# Altium PCB PCB1.PcbDoc
Units mm, origin at the board's own origin, x right, y up, seen from the top; angles counter-clockwise.
Board outline 30 x 11 mm, 2 copper layers (Top Layer, Bottom Layer), stack 1.571 mm thick; 13 components, 10 nets, 54 pads, 8 vias.
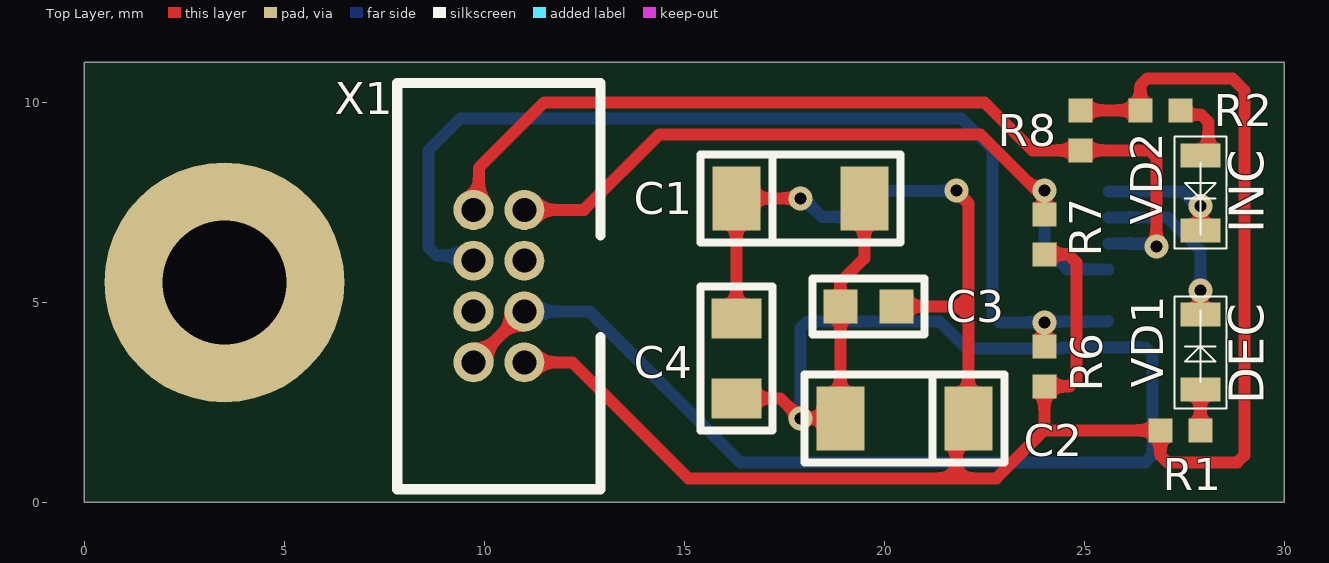
[diagram p0: Top Layer view]
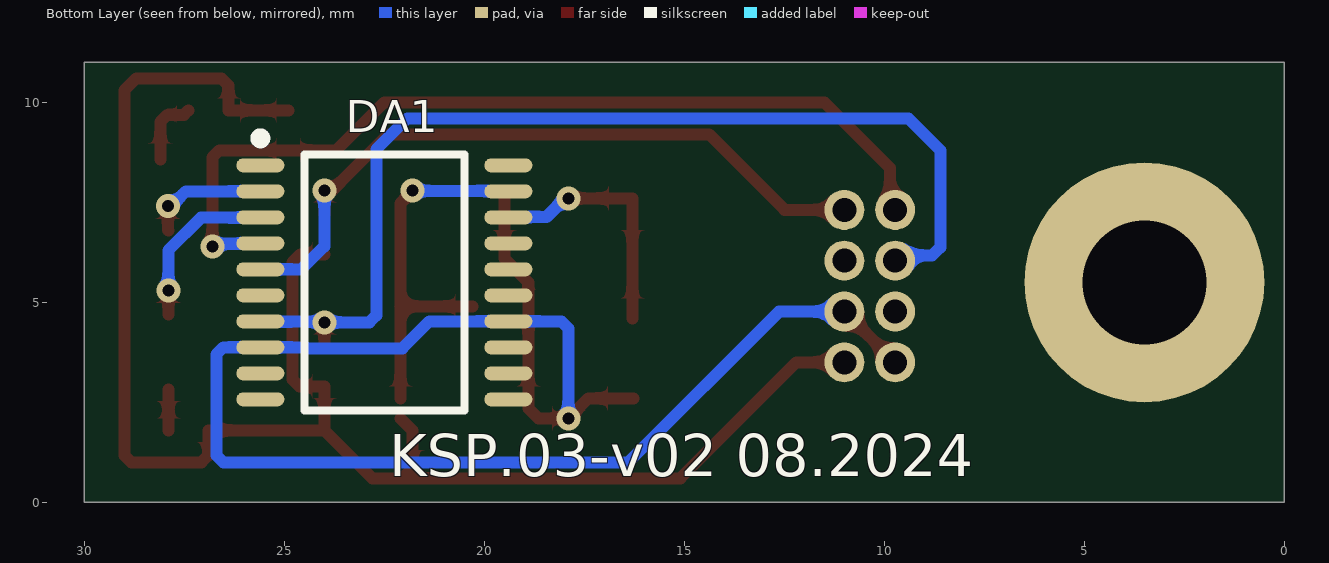
[diagram p1: Bottom Layer view, seen from below]
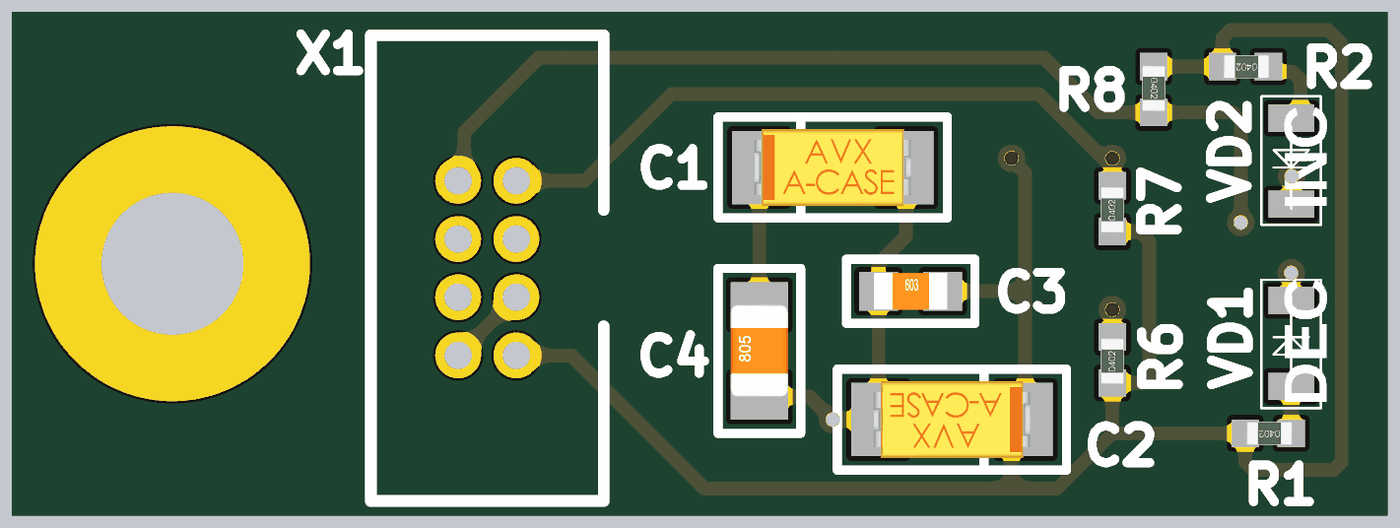
[diagram p2: 3D render of the assembled board from above, using the file's embedded part models]

## Layer stack, top to bottom
Top Solder: solder mask 0.0102, Solder Resist, Dk 3.5
Top Layer: signal copper 0.0356
Dielectric 1: dielectric 1.5, FR-4, Dk 4.8
Bottom Layer: signal copper 0.0356
Bottom Solder: solder mask 0.0102, Solder Resist, Dk 3.5

## Board outline
0,0 0,11 30,11 30,0

## Design rules (kind name [scope] priority, off if disabled: settings)
Clearance [All] p1: gap=0.2 ignorepadtopadclearanceinfootprint=FALSE except(0: Arc-Hole Track-Hole SMDPad-Hole THPad-Hole Via-Hole Fill-Hole Poly-Hole Region-Hole Text-Hole)
PolygonConnect [All] p1: connectstyle=Relief reliefconductorwidth=0.254 reliefentries=4 polygonreliefangle="90 Angle" airgapwidth=0.254
RoutingVias [All] p1: holewidth=0.711 width=1.27 viastyle="Through Hole" minholewidth=0.3 minwidth=0.6 maxholewidth=0.711 maxwidth=1.27
SolderMaskExpansion [All] p1: expansion=0.102 istentingtop=FALSE
Width [All] p1: maxlimit=3 minlimit=0.2 preferedwidth=0.5 minimp=50.000000 maximp=50.000000 favimp=50.000000
30 further rules are at their usual default settings.

## Components (designator, comment, footprint, x,y, rotation, side; value= is the part's Value field where it differs from the comment)
C1 "4.7u" TANTAL_A 17.9,7.6 r0 top
C2 "4.7u" TANTAL_A 20.5,2.1 r180 top
C3 "0.1u" CH0603C 19.6,4.9 r0 top
C4 "0.1u" CH0805C 16.3,3.6 r90 top
DA1 "AS5311" 20-TSSOP 22.5,5.5 r180 bottom
R1 "1k" CH0402R 27.4,1.8 r180 top
R2 "1k" CH0402R 26.9,9.8 r180 top
R6 "10k" CH0402R 24,3.4 r90 top
R7 "10k" CH0402R 24,6.7 r90 top
R8 "10k" CH0402R 24.9,9.3 r270 top
VD1 "LED" VD_0603 27.9,3.9 r90 top
VD2 "LED" VD_0603 27.9,7.6 r270 top
X1 "DC3-8P" "CON: DC3 2X4P" 11,3.5 r90 top

## Footprints (in the part's own frame and the unit in brackets; to place one, negate y for a bottom-side part, rotate by r counter-clockwise, add the part's x,y. Pads: shape width x height; smd on the part's side, far side on the other; paste and mask are expansions set on the pad)
20-TSSOP [mm]
  oval 1.2x0.35 smd: 1(-3.1,2.925) 2(-3.1,2.275) 3(-3.1,1.625) 4(-3.1,0.975) 5(-3.1,0.325) 6(-3.1,-0.325) 7(-3.1,-0.975) 8(-3.1,-1.625) 9(-3.1,-2.275) 10(-3.1,-2.925) 11(3.1,-2.925) 12(3.1,-2.275) 13(3.1,-1.625) 14(3.1,-0.975) 15(3.1,-0.325) 16(3.1,0.325) 17(3.1,0.975) 18(3.1,1.625) 19(3.1,2.275) 20(3.1,2.925)
  round 0.5 on Mech1: ""(-2.8,2.8)
  silkscreen extent -3.22,-3.2 2,3.72, body extent -3.3,-3.3 3.3,3.3, height 1.1
CH0402R [mm]
  rect 0.6x0.6 smd: 1(-0.5,0) 2(0.5,0)
  body extent -0.52,-0.25 0.47,0.25, height 0.34
CH0603C [mm] "Chip Capacitor, 2-Leads, Body 1,53x0,85mm, IPC Medium Density"
  rect 0.85x0.85 smd: 1(-0.7,0) 2(0.7,0)
  silkscreen extent -1.4,-0.7 1.4,0.7, body extent -0.8,-0.4 0.8,0.4, height 0.3
CH0805C [mm] "Chip Capacitor, 2-Leads, Body 2,00x1,20mm, IPC Medium Density"
  rect 1x1.25 smd: 1(-1,0) 2(1,0)
  silkscreen extent -1.8,-0.9 1.8,0.9, body extent -1,-0.62 1,0.63, height 0.78
"CON: DC3 2X4P" [mm]
  round 1 hole 0.6 mask+0.05: 1(0,0) 2(0,1.27) 3(1.27,0) 4(1.27,1.27) 5(2.54,0) 6(2.54,1.27) 7(3.81,0) 8(3.81,1.27)
  silkscreen extent -3.18,-1.91 6.98,3.18, body extent -3.1,-1.91 6.91,3.1, height 4.9
TANTAL_A [mm]
  rect 1.2x1.6 smd: 1(-1.6,0) 2(1.6,0)
  round 0.5 on Mech1: ""(-1.2,0.4)
  silkscreen extent -2.5,-1.1 2.5,1.1, body extent -1.7,-0.84 1.7,0.84, height 1.71
VD_0603 [mm]
  rect 0.6x1 smd: 1(-1.075,0) 2(0.8,0)
  silkscreen extent -1.55,-0.65 1.25,0.65

## Part data
C1 C2: library part TantalCap, Manufacturer=10u, Model=TAJA475M010RNJ
C3 C4: library part Capacitor
  C3: Model=06035C104JAT2A
  C4: Model=08055C104JAT2A
R1 R2 R6 R7 R8: library part Resistor
  R1 R2: Model=CR0402-JW-102GLF
  R6 R7 R8: Model=CR0402-JW-103GLF
X1: library part 8-Connector, Model=DC3-8P
DA1: Model=AS5311-ATST
VD1: Model=KPT-1608SGC
VD2: Model=KPT-1608YC

## Free pads (board coordinates)
  round 6 hole 3.1 mask+0.05: N(3.5,5.5)

## Via types
v1: diameter 0.6, hole 0.3, Top Layer to Bottom Layer, tented both sides, 8 vias

## Nets (pads, with @x,y where several pads share a name; then routed paths per layer and width w, separated by ;. In a path a pad name is that pad's centre, name@x,y a point inside that pad or via, vN(x,y) a via of type N, cw(c..) or ccw(c..) an arc to the next point about the centre after c; other vN are vias at no path point)
GND: C1.2 C2.2 C3.1 C4.1 DA1.8 DA1.14 X1.2 X1.3 | length 41.5
  Top Layer w0.3: X1.2 X1.3 ; C4.1@16.275,2.6 C4.1 17.4,2.6 v1(17.9,2.1) 18.65,2.1 18.9,2.35 18.9,4.2 18.9,5.5 19.5,6.1 C1.2
  Bottom Layer w0.3: X1.3 12.63,4.77 16.4,1 26.524,1 26.7,1.176 26.7,3.699 26.524,3.875 DA1.8 24.454,3.875 24.429,3.85 22.05,3.85 21.375,4.525 DA1.14 18.076,4.525 17.9,4.349 v1@17.9,2.126
NetC1_1: C1.1 C4.2 DA1.18 | length 6.3
  Top Layer w0.3: C4.2 C1.1 v1(17.9,7.6)
  Bottom Layer w0.3: v1(17.9,7.6) 17.981,7.6 18.447,7.135 19.39,7.135 DA1.18
NetC2_1: C2.1 C3.2 DA1.19 R1.2 R2.2 R6.1 R7.1 R8.1 X1.1 | length 51.3
  Top Layer w0.3: X1.1 12.2,3.5 15.1,0.6 21.8,0.6 ; C3.2 22.1,4.9 ; v1(21.8,7.8) 21.8,7.774 22.1,7.474 22.1,4.9 ; C2.1 21.8,1.8 21.8,0.6 ; C2.1@22.1,2.6 22.1,4.9 ; 24,1.9 R6.1 24.624,2.9 24.8,3.076 24.8,5.994 24.594,6.2 R7.1 ; R8.1 R2.2 26.4,10.424 26.576,10.6 28.7,10.6 29,10.3 29,1.176 28.824,1 27.076,1 26.9,1.176 R1.2 24,1.8 22.8,0.6 21.8,0.6
  Bottom Layer w0.3: DA1.19 19.41,7.785 21.785,7.785 v1(21.8,7.8)
NetDA1_2: DA1.2 VD2.2 | length 3.1
  Top Layer w0.3: VD2.2 27.91,6.81 v1(27.91,7.41)
  Bottom Layer w0.3: DA1.2 27.463,7.775 27.828,7.41 v1(27.91,7.41) v1@27.869,7.45
NetDA1_3: DA1.3 VD1.2 | length 4.2
  Top Layer w0.3: VD1.2 v1(27.9,5.3)
  Bottom Layer w0.3: DA1.3 25.61,7.115 27.085,7.115 27.9,6.3 v1(27.9,5.3)
NetDA1_4: DA1.4 R8.2 X1.8 | length 22.7
  Top Layer w0.3: X1.8 9.864,7.444 9.864,8.364 11.5,10 22.5,10 23.7,8.8 R8.2 25.5,8.8 26.624,8.8 26.8,8.624 v1(26.8,6.4)
  Bottom Layer w0.3: DA1.4 25.606,6.469 26.65,6.469 26.719,6.4 v1(26.8,6.4)
NetDA1_5: DA1.5 R7.2 X1.7 | length 18
  Top Layer w0.3: X1.7 12.49,7.31 14.38,9.2 22.4,9.2 v1@23.8,7.8 ; R7.2 v1(24,7.8)
  Bottom Layer w0.3: v1(24,7.8) 24,6.4 24.575,5.825 DA1.5
NetDA1_7: DA1.7 R6.2 X1.6 | length 26.2
  Top Layer w0.3: R6.2 v1(24,4.5)
  Bottom Layer w0.3: X1.6 9.596,6.174 8.802,6.174 8.6,6.376 8.6,8.8 9.4,9.6 21.924,9.6 22.7,8.824 22.7,4.676 22.876,4.5 v1(24,4.5) 24.015,4.515 25.571,4.515 DA1.7@25.59,4.535
NetR1_1: R1.1 VD1.1 | length 1
  Top Layer w0.3: R1.1 VD1.1
NetR2_1: R2.1 VD2.1 | length 1.8
  Top Layer w0.3: R2.1 27.512,9.688 27.924,9.688 28.1,9.512 VD2.1@28.1,8.575
pads on no net: C1. C2. DA1. DA1.1 DA1.6 DA1.9 DA1.10 DA1.11 DA1.12 DA1.13 DA1.15 DA1.16 DA1.17 DA1.20 X1.4 X1.5

## Silkscreen, mask and mechanical layers (free items; w line width, h text height)
Top Overlay:
  text "INC" at 29.775,6.725 h1.5 r90
  text "DEC" at 29.775,2.45 h1.5 r90
Bottom Overlay:
  text "KSP.03-v02 08.2024" at 22.375,0.3 h1.8